# Altium PCB pcb_LEDCUBE.PcbDoc
Units mm, origin at the board's own origin, x right, y up, seen from the top; angles counter-clockwise.
Board outline 137.03 x 81.53 mm, 2 copper layers (Top Layer, Bottom Layer); 87 components, 151 nets, 387 pads, 94 vias.
Unrouted connection lines stored in the file: 2.
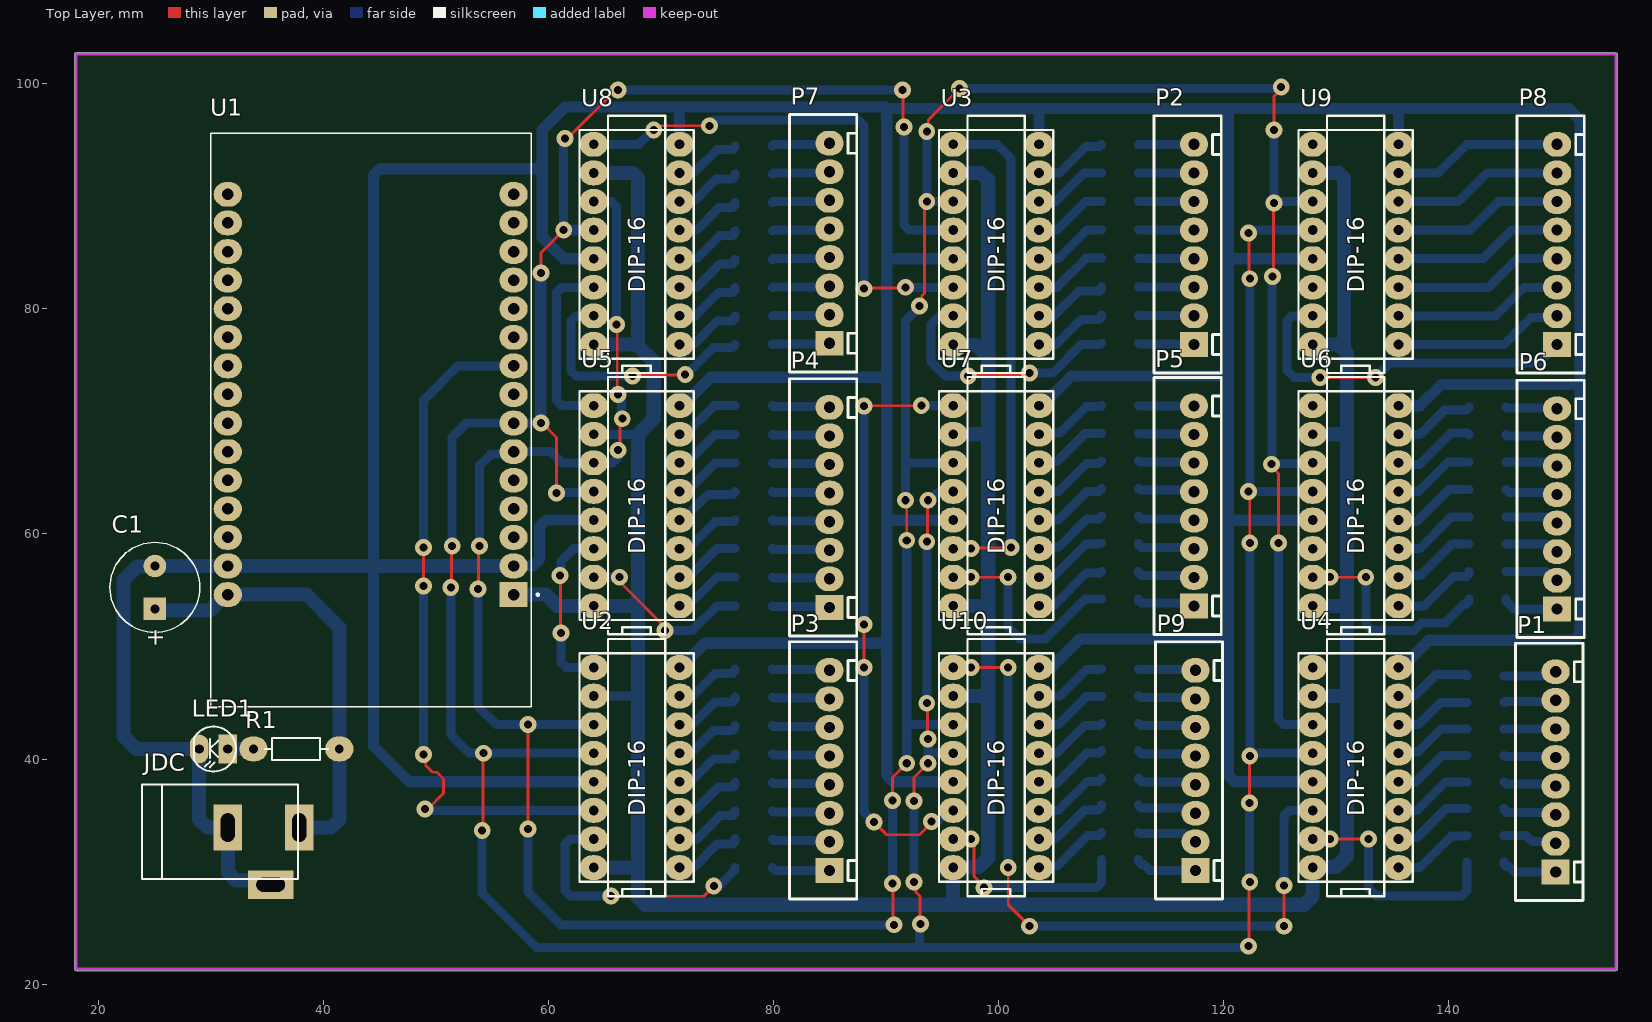
[diagram p0: Top Layer view]
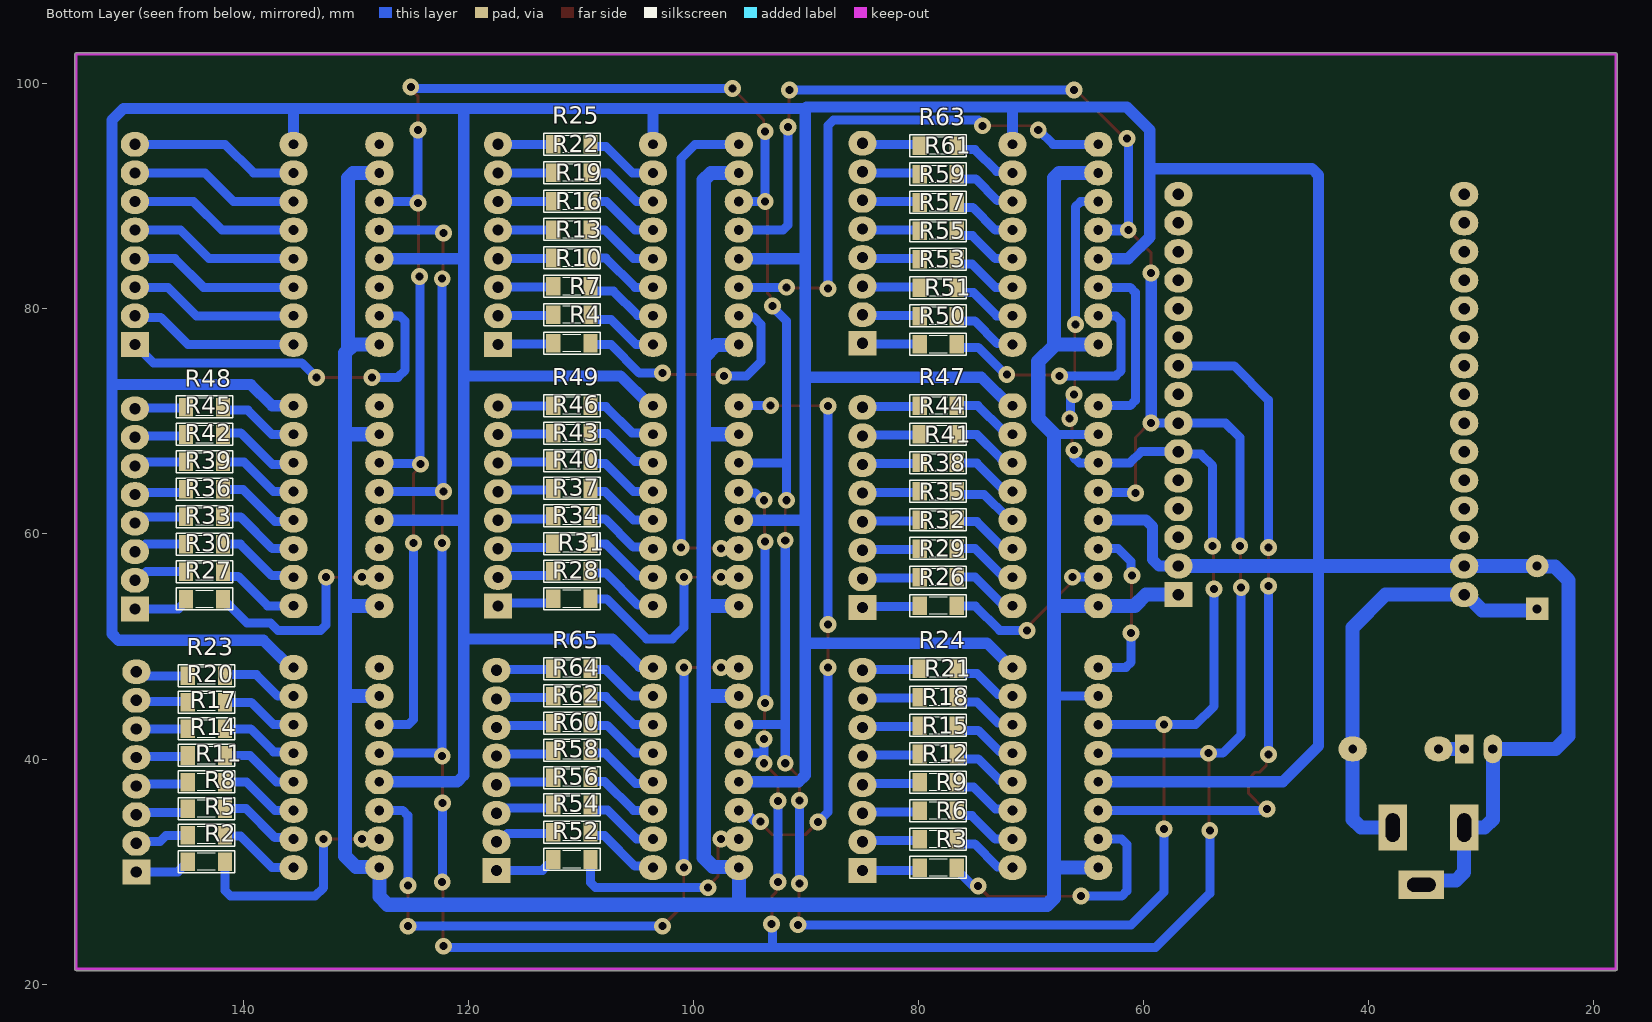
[diagram p1: Bottom Layer view, seen from below]
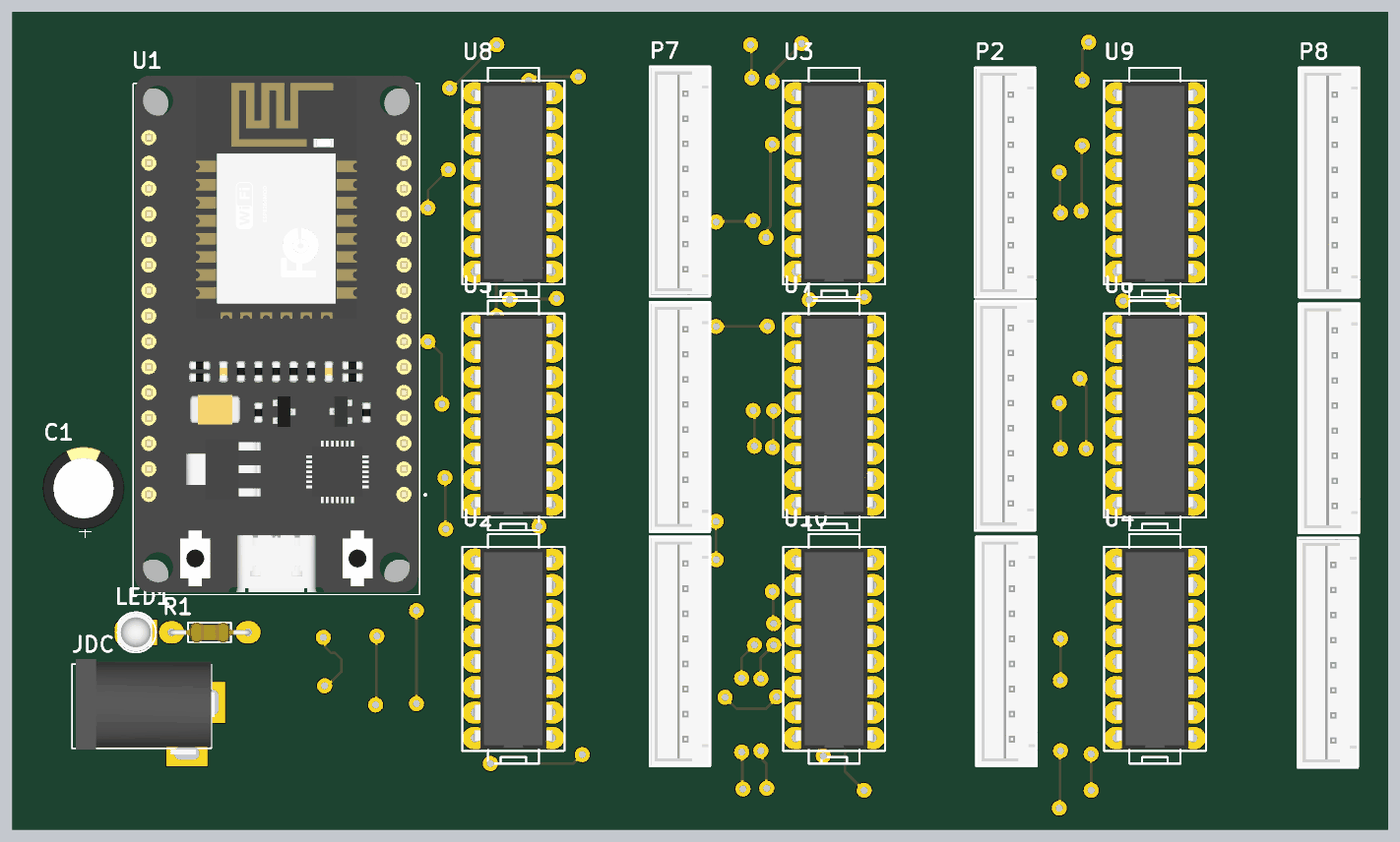
[diagram p2: 3D render of the assembled board from above, using the file's embedded part models]
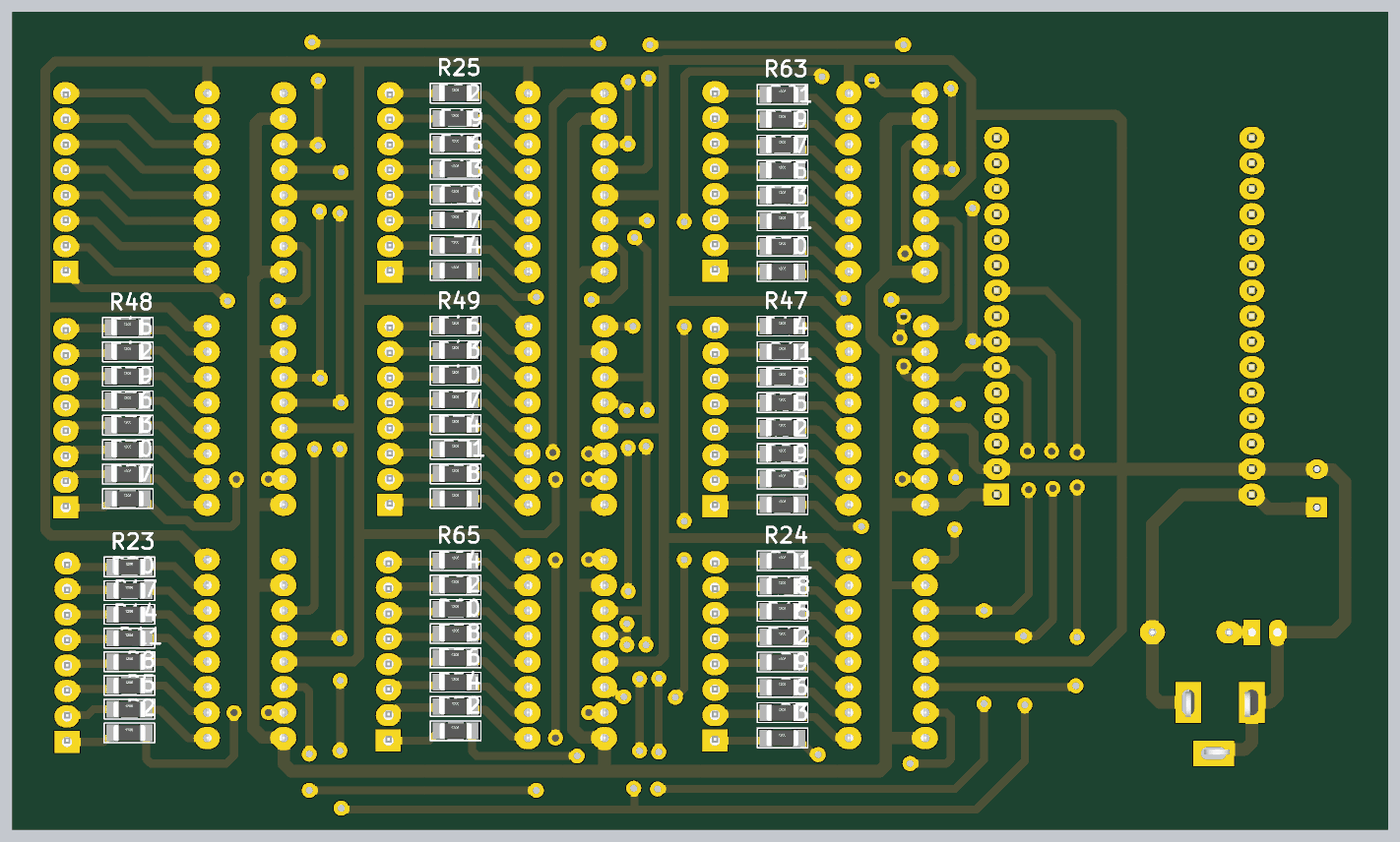
[diagram p3: 3D render of the assembled board from below, using the file's embedded part models]

## Layer stack, top to bottom
Top Solder: solder mask 0.0102, Solder Resist, Dk 3.5
Top Layer: signal copper 0.0356
Dielectric 1: dielectric 0.32, FR-4, Dk 4.8
Bottom Layer: signal copper 0.0356
Bottom Solder: solder mask 0.0102, Solder Resist, Dk 3.5

## Board outline
18.034,21.209 cw(c18.034,21.336) 17.907,21.336 17.907,102.616 cw(c18.034,102.616) 18.034,102.743 154.813,102.743 cw(c154.813,102.616) 154.94,102.616 154.94,21.336 cw(c154.813,21.336) 154.813,21.209

## Design rules (kind name [scope] priority, off if disabled: settings)
Clearance [All] p1: gap=0.254 ignorepadtopadclearanceinfootprint=FALSE except(0: Arc-Hole Track-Hole SMDPad-Hole THPad-Hole Via-Hole Fill-Hole Poly-Hole Region-Hole Text-Hole)
PolygonConnect [All] p1: connectstyle=Relief reliefconductorwidth=0.254 reliefentries=4 polygonreliefangle="90 Angle" airgapwidth=0.254
RoutingVias [All] p1: holewidth=0.711 width=1.27 viastyle="Through Hole" minholewidth=0.711 minwidth=1.27 maxholewidth=0.711 maxwidth=1.27
SolderMaskExpansion [All] p1: expansion=0.102 istentingtop=FALSE
Width [All] p1: maxlimit=1.25 minlimit=0.254 preferedwidth=1 toplayer_maxwidth=0.254 toplayer_prefwidth=0.254 bottomlayer_minwidth=0.8 minimp=50.000000 maximp=50.000000 favimp=50.000000
30 further rules are at their usual default settings.

## Components (designator, comment, footprint, x,y, rotation, side; value= is the part's Value field where it differs from the comment)
C1 "560uf/16v" CA-ALU-8 25.019,55.245 r90 top value=104
JDC "Jac DC" DC-IN 34.671,31.369 r0 top
LED1 "LED" LED-3 31.496,40.894 r180 top value="LED 3 ly Single Colour"
P1 "Header 8" CON_8P 149.479,29.972 r90 top
P2 "Header 8" CON_8P 117.348,76.835 r90 top
P3 "Header 8" CON_8P 84.963,30.099 r90 top
P4 "Header 8" CON_8P 84.963,53.467 r90 top
P5 "Header 8" CON_8P 117.348,53.594 r90 top
P6 "Header 8" CON_8P 149.606,53.34 r90 top
P7 "Header 8" CON_8P 84.963,76.937 r90 top
P8 "Header 8" CON_8P 149.606,76.835 r90 top
P9 "Header 8" CON_8P 117.475,30.099 r90 top
R1 "260" RES-1/8W 37.465,40.894 r0 top value="R1/4W - 1K"
R2 "180" RES-SMD-1206 143.256,30.861 r180 bottom
R3 "180" RES-SMD-1206 78.232,30.353 r180 bottom
R4 "180" RES-SMD-1206 110.782,76.937 r180 bottom
R5 "180" RES-SMD-1206 143.256,33.223 r180 bottom
R6 "180" RES-SMD-1206 78.232,32.877 r180 bottom
R7 "180" RES-SMD-1206 110.782,79.462 r180 bottom
R8 "180" RES-SMD-1206 143.256,35.585 r180 bottom
R9 "180" RES-SMD-1206 78.232,35.4 r180 bottom
R10 "180" RES-SMD-1206 110.782,81.988 r180 bottom
R11 "180" RES-SMD-1206 143.256,37.948 r180 bottom
R12 "180" RES-SMD-1206 78.232,37.924 r180 bottom
R13 "180" RES-SMD-1206 110.782,84.513 r180 bottom
R14 "180" RES-SMD-1206 143.256,40.31 r180 bottom
R15 "180" RES-SMD-1206 78.232,40.448 r180 bottom
R16 "180" RES-SMD-1206 110.782,87.039 r180 bottom
R17 "180" RES-SMD-1206 143.256,42.672 r180 bottom
R18 "180" RES-SMD-1206 78.232,42.971 r180 bottom
R19 "180" RES-SMD-1206 110.782,89.564 r180 bottom
R20 "180" RES-SMD-1206 143.256,45.034 r180 bottom
R21 "180" RES-SMD-1206 78.232,45.495 r180 bottom
R22 "180" RES-SMD-1206 110.782,92.09 r180 bottom
R23 "180" RES-SMD-1206 143.256,47.396 r180 bottom
R24 "180" RES-SMD-1206 78.232,48.019 r180 bottom
R25 "180" RES-SMD-1206 110.782,94.615 r180 bottom
R26 "180" RES-SMD-1206 78.232,53.614 r180 bottom
R27 "180" RES-SMD-1206 143.421,54.21 r180 bottom
R28 "180" RES-SMD-1206 110.782,54.224 r180 bottom
R29 "180" RES-SMD-1206 78.232,56.154 r180 bottom
R30 "180" RES-SMD-1206 143.421,56.647 r180 bottom
R31 "180" RES-SMD-1206 110.782,56.676 r180 bottom
R32 "180" RES-SMD-1206 78.232,58.694 r180 bottom
R33 "180" RES-SMD-1206 143.421,59.084 r180 bottom
R34 "180" RES-SMD-1206 110.782,59.129 r180 bottom
R35 "180" RES-SMD-1206 78.232,61.234 r180 bottom
R36 "180" RES-SMD-1206 143.421,61.522 r180 bottom
R37 "180" RES-SMD-1206 110.782,61.582 r180 bottom
R38 "180" RES-SMD-1206 78.232,63.774 r180 bottom
R39 "180" RES-SMD-1206 143.421,63.959 r180 bottom
R40 "180" RES-SMD-1206 110.782,64.035 r180 bottom
R41 "180" RES-SMD-1206 78.232,66.314 r180 bottom
R42 "180" RES-SMD-1206 143.421,66.397 r180 bottom
R43 "180" RES-SMD-1206 110.782,66.488 r180 bottom
R44 "180" RES-SMD-1206 78.232,68.854 r180 bottom
R45 "180" RES-SMD-1206 143.421,68.834 r180 bottom
R46 "180" RES-SMD-1206 110.782,68.941 r180 bottom
R47 "180" RES-SMD-1206 78.232,71.394 r180 bottom
R48 "180" RES-SMD-1206 143.421,71.271 r180 bottom
R49 "180" RES-SMD-1206 110.782,71.394 r180 bottom
R50 "180" RES-SMD-1206 78.232,76.835 r180 bottom
R51 "180" RES-SMD-1206 78.232,79.357 r180 bottom
R52 "180" RES-SMD-1206 110.782,31.071 r180 bottom
R53 "180" RES-SMD-1206 78.232,81.879 r180 bottom
R54 "180" RES-SMD-1206 110.782,33.492 r180 bottom
R55 "180" RES-SMD-1206 78.232,84.401 r180 bottom
R56 "180" RES-SMD-1206 110.782,35.912 r180 bottom
R57 "180" RES-SMD-1206 78.232,86.922 r180 bottom
R58 "180" RES-SMD-1206 110.782,38.332 r180 bottom
R59 "180" RES-SMD-1206 78.232,89.444 r180 bottom
R60 "180" RES-SMD-1206 110.782,40.752 r180 bottom
R61 "180" RES-SMD-1206 78.232,91.966 r180 bottom
R62 "180" RES-SMD-1206 110.782,43.173 r180 bottom
R63 "180" RES-SMD-1206 78.232,94.488 r180 bottom
R64 "180" RES-SMD-1206 110.782,45.593 r180 bottom
R65 "180" RES-SMD-1206 110.782,48.013 r180 bottom
U1 "ESP32-DEVKIT-V1" MODULE_ESP32_DEVKIT_V1 44.196,70.125 r180 top
U2 "MC74HC595AN" DIP.100/16/W.300/L.900 67.818,39.25 r90 top
U3 "MC74HC595AN" DIP.100/16/W.300/L.900 99.757,85.732 r90 top
U4 "MC74HC595AN" DIP.100/16/W.300/L.900 131.697,39.25 r90 top
U5 "MC74HC595AN" DIP.100/16/W.300/L.900 67.816,62.511 r90 top
U6 "MC74HC595AN" DIP.100/16/W.300/L.900 131.697,62.511 r90 top
U7 "MC74HC595AN" DIP.100/16/W.300/L.900 99.757,62.511 r90 top
U8 "MC74HC595AN" DIP.100/16/W.300/L.900 67.816,85.732 r90 top
U9 "MC74HC595AN" DIP.100/16/W.300/L.900 131.697,85.732 r90 top
U10 "MC74HC595AN" DIP.100/16/W.300/L.900 99.758,39.25 r90 top

## Footprints (in the part's own frame and the unit in brackets; to place one, negate y for a bottom-side part, rotate by r counter-clockwise, add the part's x,y. Pads: shape width x height; smd on the part's side, far side on the other; paste and mask are expansions set on the pad)
CA-ALU-8 [mm] "Polarized capacitors, Aluminum Electrolytic Capacitors, 2-Leads, Body 8x16x3.5x0.5"
  rect 2x2 hole 0.8: 1(-1.905,0)
  round 2 hole 0.8: 2(1.905,0)
  silkscreen extent -4,-4 4,4, body extent -4.1,-4.1 4.1,4.1, height 14.4
CON_8P [mm]
  rect 2.2x2.5 hole 1 unplated: 1(0,0)
  oval 2.2x2.5 hole 1 unplated: 2(2.54,0) 3(5.08,0)
  oval 2.2x2.5 hole 1 unplated mask+0.102: 4(7.62,0) 5(10.16,0) 6(12.7,0) 7(15.24,0) 8(17.78,0)
  silkscreen extent -2.54,-2.41 20.32,3.56, body extent -2.41,-2.29 20.19,3.41, height 7
DC-IN [mil]
  rect 100x160 hole 50 slot 100 at 90 deg: 1(125,100) 2(-125,100)
  rect 160x100 hole 50 slot 100 at 0 deg: 3(25,-100)
  silkscreen extent -425,-80 120,250, body extent -410,-105 134,269, height 434
DIP.100/16/W.300/L.900 [mm]
  oval 2.2x2.5 hole 0.864: 1(-8.897,-3.812) 2(-6.357,-3.812) 3(-3.817,-3.812) 4(-1.277,-3.812) 5(1.263,-3.812) 6(3.803,-3.812) 7(6.343,-3.812) 8(8.883,-3.812) 9(8.883,3.808) 10(6.343,3.808) 11(3.803,3.808) 12(1.263,3.808) 13(-1.277,3.808) 14(-3.817,3.808) 15(-6.357,3.808) 16(-8.897,3.808)
  silkscreen extent -11.44,-5.08 11.42,5.08, body extent -10,-3.93 10,3.94, height 2.49
LED-3 [mil] "LED 2 PIN, 3ly Only colour"
  rect 65x100 hole 32: 1(0,0)
  oval 65x100 hole 32: 2(100,0)
  silkscreen extent -29,-78 118,79, body extent -13,-75 125,75, height 217
MODULE_ESP32_DEVKIT_V1 [mm]
  rect 2.5x2.2 hole 1.02: 1(-12.7,15.515)
  oval 2.5x2.2 hole 1.02: 2(-12.7,12.975) 3(-12.7,10.435) 4(-12.7,7.895) 5(-12.7,5.355) 6(-12.7,2.815) 7(-12.7,0.275) 8(-12.7,-2.265) 9(-12.7,-4.805) 10(-12.7,-7.345) 11(-12.7,-9.885) 12(-12.7,-12.425) 13(-12.7,-14.965) 14(-12.7,-17.505) 15(-12.7,-20.045) 16(12.7,-20.045) 17(12.7,-17.505) 18(12.7,-14.965) 19(12.7,-12.425) 20(12.7,-9.885) 21(12.7,-7.345) 22(12.7,-4.805) 23(12.7,-2.265) 24(12.7,0.275) 25(12.7,2.815) 26(12.7,5.355) 27(12.7,7.895) 28(12.7,10.435) 29(12.7,12.975) 30(12.7,15.515)
  round 3 on Top Paste: ""(-12.28,23.475) ""(-12.28,-23.475) ""(12.23,23.475) ""(12.23,-23.475)
  silkscreen extent -14.95,-25.48 14.23,25.48, body extent -14.1,-26.26 14.05,25.24, height 7.01
RES-1/8W [mm]
  oval 2.5x2.2 hole 0.787: 1(-3.683,0) 2(3.937,0)
  silkscreen extent -2.67,-0.97 2.92,0.97, body extent -3.92,-1.02 4.18,0.98, height 2.02
RES-SMD-1206 [mil]
  rect 50x65 smd: 1(-65,0) 2(65,0)
  silkscreen extent -99,-38 99,39, body extent -63,-31 63,32, height 40

## Part data
C1: library part CAP-ALU-DIP, "Capacitor (Semiconductor SIM Model)", LatestRevisionDate=17-Jul-2002, LatestRevisionNote="Re-released for DXP Platform.", PackageReference=C1206, Publisher="Altium Limited"
JDC: library part DCIN, "Jac DC input"
LED1: "LED Single colour Green and Red"
P1 P2 P3 P4 P5 P6 P7 P8 P9: "Header, 8-Pin", LatestRevisionDate=17-Jul-2002, LatestRevisionNote="Re-released for DXP Platform.", Publisher="Altium Limited"
R1: library part "Resistor - DIP", "Resistor - DIP"
R2 R3 R4 R5 R6 R7 R8 R9 R10 R11 R12 R13 R14 R15 R16 R17 R18 R19 R20 R21 R22 R23 R24 R25 R26 R27 R28 R29 R30 R31 R32 R33 R34 R35 R36 R37 R38 R39 R40 R41 R42 R43 R44 R45 R46 R47 R48 R49 R50 R51 R52 R53 R54 R55 R56 R57 R58 R59 R60 R61 R62 R63 R64 R65: library part "Resistor - SMD", "Resistor SMD", Manufacturer="Generic Components", Class=Passive, Published=08/06/2000, Publisher="Altium Hobart Technology Centre"
U1: "Dual core, Wi-Fi: 2.4 GHz up to 150 Mbits/s,BLE (Bluetooth Low Energy) and legacy Bluetooth, 32 bits, Up to 240 MHz", Package=None, Availability=Unavailable, MP=ESP32-DEVKIT-V1, Price=None
U2 U3 U4 U5 U6 U7 U8 U9 U10: "8-Bit Serial-Input/Serial or Prallel-Output Shift Register with Latched 3-State Outputs", Code_JEDEC=MS-001-BB, ComponentLink1Description="Manufacturer Link", ComponentLink1URL=http://www.onsemi.com/, ComponentLink2Description=Datasheet, ComponentLink2URL=http://www.onsemi.com/pub/Collateral/MC74HC595A-D.PDF, DatasheetVersion=Mar-2000, PackageDescription="DIP; 16 Leads; Row Spacing 7.62 mm; Pitch 2.54 mm", PackageReference=648-08, PackageVersion=Apr-2000, Published=15-Apr-2002, Publisher="Altium Limited"

## Via types
v1: diameter 1.5, hole 0.711, Top Layer to Bottom Layer, 94 vias

## Nets (pads, with @x,y where several pads share a name; then routed paths per layer and width w, separated by ;. In a path a pad name is that pad's centre, name@x,y a point inside that pad or via, vN(x,y) a via of type N, cw(c..) or ccw(c..) an arc to the next point about the centre after c; other vN are vias at no path point)
+3.3: U1.1 U2.10 U2.16 U3.10 U3.16 U4.10 U4.16 U5.10 U5.16 U6.10 U6.16 U7.10 U7.16 U8.10 U8.16 U9.10 U9.16 U10.10 U10.16 | length 321.3
  Bottom Layer w0.8: U5.10 67.925,68.854 67.945,68.834 ; U2.10 67.945,45.593
  Bottom Layer w1.25: U1.1 59.771,54.61 60.767,53.614 U5.16 67.925,53.614 67.945,53.594 ; U8.16 67.818,76.835 67.945,76.708 ; U8.10 67.476,92.075 67.945,91.606 67.945,76.708 ; U2.16 67.818,30.353 67.945,30.226 ; 67.925,68.854 69.342,70.271 69.342,75.311 67.945,76.708 ; 67.945,68.834 67.945,53.594 ; U7.16 98.913,53.614 99.06,53.467 ; U7.10 99.04,68.854 99.06,68.834 ; U3.16 95.996,76.787 97.965,76.787 99.06,75.692 ; U3.10 98.425,92.075 99.06,91.44 99.06,75.692 ; U10.10 99.06,45.593 ; U4.10 130.81,45.593 130.937,45.466 ; U6.16 130.83,53.614 130.937,53.721 ; U6.10 130.917,68.854 130.937,68.834 ; U9.16 130.175,76.835 130.429,76.581 ; U9.10 130.214,92.075 130.683,91.606 130.683,76.327 ; 130.937,76.073 130.937,68.834 ; 67.945,30.226 67.945,45.593 67.945,53.594 ; 67.945,30.226 67.945,27.656 68.55,27.051 95.885,27.051 ; 95.885,27.051 127.157,27.051 127.889,27.783 U4.16 127.937,30.401 129.969,30.401 130.937,31.369 130.937,45.466 ; 95.885,27.051 95.949,27.115 U10.16 95.997,30.401 98.219,30.401 99.06,31.242 99.06,45.593 ; 99.06,45.593 99.06,53.467 ; 99.06,53.467 99.06,68.834 ; 99.06,68.834 99.06,75.692 ; 130.937,45.466 130.937,53.721 ; 130.937,53.721 130.937,68.834
+5: C1.1 JDC.1 R1.2 U1.30 | length 39.1
  Bottom Layer w1.25: C1.1 25.144,53.215 27.644,53.215 27.646,53.213 29.896,53.213 31.293,54.61 U1.30 38.481,54.61 41.402,51.689 R1.2 41.402,34.641 40.67,33.909 JDC.1
Data: U1.9 U2.14 | length 62.4
  Top Layer w0.254: v1(48.895,40.386) 49.089,40.192 49.089,39.43 49.691,38.828 50.072,38.828 50.673,38.227 50.673,36.957 49.276,35.56 v1(49.022,35.56) ; v1(48.895,55.372) v1(48.895,58.801)
  Bottom Layer w0.8: v1(48.895,40.386) v1(48.895,55.372) ; v1(48.895,58.801) 48.895,71.882 51.943,74.93 U1.9 ; v1(49.022,35.56) 49.112,35.47 49.444,35.47 49.481,35.433 U2.14
Data_1: U2.9 U5.14 | length 15.5
  Top Layer w0.254: v1(61.005,56.306) 61.046,56.265 61.046,51.222 v1(61.087,51.181)
  Bottom Layer w0.8: v1(61.005,56.306) 61.095,56.396 61.095,57.539 62.25,58.694 U5.14 ; v1(61.087,51.181) 61.087,48.602 61.556,48.133 U2.9
Data_2: U5.9 U8.14 | length 16.6
  Bottom Layer w0.8: U5.9 61.175,71.394 60.706,71.863 60.706,81.446 61.175,81.915 U8.14
Data_3: U3.14 U8.9 | length 47.1
  Top Layer w0.254: v1(69.342,95.885) 69.617,95.885 69.998,96.266 v1(74.295,96.266) ; v1(88.011,81.788) 88.075,81.852 91.504,81.852 91.567,81.788 v1(91.694,81.915)
  Bottom Layer w0.8: U8.9 68.017,94.615 69.287,95.885 v1(69.342,95.885) ; v1@74.66,96.774 87.542,96.774 88.011,96.305 v1(88.011,81.788) ; v1(91.694,81.915) U3.14
Data_4: U3.9 U7.14 | length 45.6
  Top Layer w0.254: v1(97.546,58.694) 97.599,58.747 101.038,58.747 v1(101.092,58.801)
  Bottom Layer w0.8: U7.14 v1(97.546,58.694) v1@97.761,58.694 ; U3.9 99.822,94.615 101.092,93.345 v1(101.092,58.801)
Data_5: U7.9 U10.14 | length 53.8
  Top Layer w0.254: v1(88.011,48.133) v1(88.011,51.943) ; v1(88.011,71.374) 88.021,71.384 93.081,71.384 93.091,71.374 v1(93.111,71.394) ; v1(88.9,34.417) 90.043,33.274 92.964,33.274 94.025,34.335 v1(94.025,34.462)
  Bottom Layer w0.8: v1(88.011,48.133) 88.011,35.306 v1(88.9,34.417) ; v1(88.011,51.943) v1(88.011,71.374) ; v1(93.111,71.394) U7.9 ; v1(94.025,34.462) 94.115,34.552 94.629,34.552 95.51,35.433 U10.14
Data_6: U4.14 U10.9 | length 62.2
  Top Layer w0.254: v1(97.536,48.133) v1(100.838,48.133) ; v1(100.838,30.353) 100.838,27.051 v1(102.743,25.146) ; v1(125.349,25.146) v1(125.349,28.757)
  Bottom Layer w0.8: v1(100.838,30.353) v1(100.838,48.133) ; v1(102.743,25.146) v1(125.349,25.146) ; v1(125.349,28.757) 125.349,34.964 125.818,35.433 U4.14
Data_7: U4.9 U6.14
Data_8: U6.9 U9.14
G_P1: P8.1 U9.15 | length 32.3
  Top Layer w0.254: v1(128.524,73.914) v1(133.477,73.914)
  Bottom Layer w0.8: U9.15 126.072,79.375 125.603,78.906 125.603,74.549 126.238,73.914 v1(128.524,73.914) ; v1(133.477,73.914) 133.51,73.914 134.791,75.195 147.966,75.195 P8.1
G_P2: P8.2 U9.1 | length 15.1
  Bottom Layer w0.8: U9.1 144.907,76.835 147.32,79.248 149.479,79.248 P8.2
G_P3: P8.3 U9.2 | length 15.1
  Bottom Layer w0.8: U9.2 144.145,79.375 146.685,81.915 P8.3
G_P4: P8.4 U9.3 | length 15.1
  Bottom Layer w0.8: U9.3 143.51,81.915 146.05,84.455 P8.4
G_P5: P8.5 U9.4 | length 15.1
  Bottom Layer w0.8: U9.4 143.002,84.455 145.542,86.995 P8.5
G_P6: P8.6 U9.5 | length 15.1
  Bottom Layer w0.8: U9.5 141.859,86.995 144.399,89.535 P8.6
G_P7: P8.7 U9.6 | length 15.1
  Bottom Layer w0.8: U9.6 140.843,89.535 143.383,92.075 P8.7
G_P8: P8.8 U9.7 | length 15.1
  Bottom Layer w0.8: U9.7 139.065,92.075 141.605,94.615 P8.8
GND: C1.2 JDC.2 JDC.3 LED1.2 U1.2 U1.29 U2.8 U2.13 U3.8 U3.13 U4.8 U4.13 U5.8 U5.13 U6.8 U6.13 U7.8 U7.13 U8.8 U8.13 U9.8 U9.13 U10.8 U10.13 | length 602.3
  Bottom Layer w1: U1.2 58.596,57.15 59.182,57.736 59.182,60.648 59.768,61.234 U5.13 ; U8.13 61.341,84.455 59.436,86.36 59.436,92.456 ; U2.13 47.625,37.973 44.45,41.148 44.45,57.15 44.45,91.87 45.036,92.456 59.436,92.456 ; U5.8 71.878,71.394 74.398,73.914 90.043,73.914 ; U8.8 71.628,97.536 ; U2.8 71.745,48.133 72.13,48.518 73.904,50.292 90.043,50.292 ; U7.13 95.929,61.214 90.043,61.214 ; U3.13 90.043,84.455 ; U10.13 90.629,37.973 90.043,38.559 90.043,50.292 ; U7.8 103.818,71.394 106.465,74.041 120.396,74.041 ; U3.8 103.569,97.727 103.632,97.79 ; U10.8 103.665,48.229 104.744,48.229 107.188,50.673 120.396,50.673 ; U4.13 120.966,37.973 120.396,38.543 120.396,50.673 ; U6.13 127.869,61.214 120.396,61.214 ; U9.13 120.396,84.455 ; U4.8 135.759,48.133 138.172,50.546 151.052,50.546 151.638,51.132 151.638,73.279 ; U6.8 137.434,71.394 139.319,73.279 151.638,73.279 ; U9.8 135.509,97.79 ; 59.436,92.456 59.436,95.885 61.479,97.928 71.628,97.928 89.905,97.928 90.043,97.79 ; 90.043,50.292 90.043,61.214 ; 90.043,61.214 90.043,73.914 ; 90.043,73.914 90.043,84.455 ; 90.043,84.455 90.043,97.79 ; 90.043,97.79 103.632,97.79 ; 103.632,97.79 120.396,97.79 ; 120.396,50.673 120.396,61.214 ; 120.396,61.214 120.396,74.041 ; 120.396,74.041 120.396,84.455 ; 120.396,84.455 120.396,97.79 ; 120.396,97.79 135.509,97.79 ; 135.509,97.79 150.622,97.79 151.638,96.774 151.638,73.279
  Bottom Layer w1.25: JDC.3 34.93,29.205 32.228,29.205 31.496,29.937 JDC.2 29.688,33.909 28.956,34.641 LED1.2 23.368,40.894 22.225,42.037 22.225,55.88 23.447,57.102 24.971,57.102 C1.2 U1.29 44.45,57.15 U1.2
L1_A1: P3.1 R3.1 | length 5.2
  Bottom Layer w0.8: R3.1 79.883,30.334 80.118,30.099 P3.1
L1_A2: P3.2 R6.1 | length 5.2
  Bottom Layer w0.8: R6.1 80.002,32.758 84.844,32.758 P3.2
L1_A3: P3.3 R9.1 | length 5.2
  Bottom Layer w0.8: R9.1 79.994,35.29 84.852,35.29 P3.3
L1_A4: P3.4 R12.1 | length 5.2
  Bottom Layer w0.8: R12.1 79.986,37.822 84.86,37.822 P3.4
L1_A5: P3.5 R15.1 | length 5.2
  Bottom Layer w0.8: R15.1 79.977,40.353 84.869,40.353 P3.5
L1_A6: P3.6 R18.1 | length 5.2
  Bottom Layer w0.8: R18.1 79.969,42.885 84.877,42.885 P3.6
L1_A7: P3.7 R21.1 | length 5.1
  Bottom Layer w0.8: R21.1 79.961,45.417 84.885,45.417 P3.7
L1_A8: P3.8 R24.1 | length 5.1
  Bottom Layer w0.8: R24.1 79.953,47.949 84.893,47.949 P3.8
L2_A1: P4.1 R26.1 | length 5.1
  Bottom Layer w0.8: R26.1 79.957,53.54 84.89,53.54 P4.1
L2_A2: P4.2 R29.1 | length 5.1
  Bottom Layer w0.8: R29.1 79.957,56.081 84.889,56.081 P4.2
L2_A3: P4.3 R32.1 | length 5.1
  Bottom Layer w0.8: R32.1 79.957,58.621 84.889,58.621 P4.3
L2_A4: P4.4 R35.1 | length 5.1
  Bottom Layer w0.8: R35.1 79.957,61.161 84.889,61.161 P4.4
L2_A5: P4.5 R38.1 | length 5.1
  Bottom Layer w0.8: R38.1 79.957,63.701 84.889,63.701 P4.5
L2_A6: P4.6 R41.1 | length 5.1
  Bottom Layer w0.8: R41.1 79.957,66.241 84.889,66.241 P4.6
L2_A7: P4.7 R44.1 | length 5.1
  Bottom Layer w0.8: R44.1 79.957,68.781 84.889,68.781 P4.7
L2_A8: P4.8 R47.1 | length 5.1
  Bottom Layer w0.8: R47.1 79.957,71.321 84.889,71.321 P4.8
L3_A1: P7.1 R50.1 | length 5.1
  Bottom Layer w0.8: R50.1 79.934,76.886 84.912,76.886 P7.1
L3_A2: P7.2 R51.1 | length 5.1
  Bottom Layer w0.8: R51.1 79.943,79.417 84.903,79.417 P7.2
L3_A3: P7.3 R53.1 | length 5.1
  Bottom Layer w0.8: R53.1 79.952,81.948 84.894,81.948 P7.3
L3_A4: P7.4 R55.1 | length 5.1
  Bottom Layer w0.8: R55.1 79.961,84.479 84.885,84.479 P7.4
L3_A5: P7.5 R57.1 | length 5.2
  Bottom Layer w0.8: R57.1 79.97,87.01 84.876,87.01 P7.5
L3_A6: P7.6 R59.1 | length 5.2
  Bottom Layer w0.8: R59.1 79.979,89.541 84.867,89.541 P7.6
L3_A7: P7.7 R61.1 | length 5.2
  Bottom Layer w0.8: R61.1 79.988,92.071 84.858,92.071 P7.7
L3_A8: P7.8 R63.1 | length 5.2
  Bottom Layer w0.8: R63.1 79.997,94.602 84.849,94.602 P7.8
L4_A1: P2.1 R4.1 | length 5
  Bottom Layer w0.8: R4.1 112.484,76.886 117.297,76.886 P2.1
L4_A2: P2.2 R7.1 | length 5
  Bottom Layer w0.8: R7.1 112.477,79.419 117.304,79.419 P2.2
L4_A3: P2.3 R10.1 | length 4.9
  Bottom Layer w0.8: R10.1 112.469,81.951 117.312,81.951 P2.3
L4_A4: P2.4 R13.1 | length 4.9
  Bottom Layer w0.8: R13.1 112.462,84.484 117.319,84.484 P2.4
L4_A5: P2.5 R16.1 | length 4.9
  Bottom Layer w0.8: R16.1 112.455,87.017 117.326,87.017 P2.5
L4_A6: P2.6 R19.1 | length 4.9
  Bottom Layer w0.8: R19.1 112.448,89.55 117.333,89.55 P2.6
L4_A7: P2.7 R22.1 | length 4.9
  Bottom Layer w0.8: R22.1 112.44,92.082 117.341,92.082 P2.7
L4_A8: P2.8 R25.1 | length 4.9
  Bottom Layer w0.8: R25.1 P2.8
L5_A1: P5.1 R28.1 | length 5.3
  Bottom Layer w0.8: R28.1 112.433,54.083 112.668,53.848 117.094,53.848 P5.1
L5_A2: P5.2 R31.1 | length 5.2
  Bottom Layer w0.8: R31.1 112.433,56.556 112.668,56.321 117.161,56.321 P5.2
L5_A3: P5.3 R34.1 | length 5.2
  Bottom Layer w0.8: R34.1 112.433,59.036 112.668,58.801 117.221,58.801 P5.3
L5_A4: P5.4 R37.1 | length 5.1
  Bottom Layer w0.8: R37.1 112.433,61.576 112.668,61.341 117.221,61.341 P5.4
L5_A5: P5.5 R40.1 | length 5
  Bottom Layer w0.8: R40.1 112.574,63.895 117.207,63.895 P5.5
L5_A6: P5.6 R43.1 | length 5
  Bottom Layer w0.8: R43.1 112.53,66.391 117.251,66.391 P5.6
L5_A7: P5.7 R46.1 | length 5
  Bottom Layer w0.8: R46.1 112.487,68.888 117.294,68.888 P5.7
L5_A8: P5.8 R49.1 | length 4.9
  Bottom Layer w0.8: R49.1 112.443,71.384 117.338,71.384 P5.8
L6_A1: P9.1 R52.1 | length 5.6
  Bottom Layer w0.8: R52.1 112.433,30.881 112.668,30.646 112.859,30.646 113.406,30.099 P9.1
L6_A2: P9.2 R54.1 | length 5.4
  Bottom Layer w0.8: R54.1 112.524,33.401 116.517,33.401 117.279,32.639 P9.2
L6_A3: P9.3 R56.1 | length 5.4
  Bottom Layer w0.8: R56.1 112.433,35.864 112.668,35.629 116.761,35.629 117.21,35.179 P9.3
L6_A4: P9.4 R58.1 | length 5.4
  Bottom Layer w0.8: R58.1 112.433,38.208 112.668,37.973 116.529,37.973 116.596,37.906 117.288,37.906 P9.4
L6_A5: P9.5 R60.1 | length 5.3
  Bottom Layer w0.8: R60.1 112.433,40.681 112.668,40.446 117.288,40.446 P9.5
L6_A7: P9.7 R64.1 | length 5.1
  Bottom Layer w0.8: R64.1 112.56,45.466 117.348,45.466 P9.7
L6_A8: P9.8 R65.1 | length 5.1
  Bottom Layer w0.8: R65.1 112.5,47.946 117.408,47.946 P9.8
L7_A1: P1.1 R2.1 | length 5.1
  Bottom Layer w0.8: R2.1 144.907,30.67 145.142,30.436 145.332,30.436 145.796,29.972 P1.1
L7_A2: P1.2 R5.1 | length 4.9
  Bottom Layer w0.8: R5.1 146.823,33.223 147.39,32.656 149.335,32.656 P1.2
L7_A3: P1.3 R8.1 | length 4.9
  Bottom Layer w0.8: R8.1 144.907,35.474 145.142,35.239 149.292,35.239 P1.3
L7_A4: P1.4 R11.1 | length 4.7
  Bottom Layer w0.8: R11.1 145.085,37.77 149.301,37.77 P1.4
L7_A5: P1.5 R14.1 | length 4.6
  Bottom Layer w0.8: R14.1 144.996,40.221 149.39,40.221 P1.5
L7_A6: P1.6 R17.1 | length 4.6
  Bottom Layer w0.8: R17.1 P1.6
L7_A7: P1.7 R20.1 | length 4.6
  Bottom Layer w0.8: R20.1 144.996,45.123 149.39,45.123 P1.7
L7_A8: P1.8 R23.1 | length 4.7
  Bottom Layer w0.8: R23.1 148.859,47.396 149.214,47.752 P1.8
L8_A1: P6.1 R27.1 | length 5
  Bottom Layer w0.8: R27.1 145.072,54.019 145.751,53.34 P6.1
L8_A2: P6.2 R30.1 | length 4.9
  Bottom Layer w0.8: R30.1 148.574,56.647 149.341,55.88 P6.2
L8_A3: P6.3 R33.1 | length 4.8
  Bottom Layer w0.8: R33.1 148.677,59.085 149.341,58.42 P6.3
L8_A4: P6.4 R36.1 | length 4.8
  Bottom Layer w0.8: R36.1 148.779,61.522 149.341,60.96 P6.4
L8_A5: P6.5 R39.1 | length 4.7
  Bottom Layer w0.8: R39.1 145.072,63.922 145.307,63.687 149.419,63.687 P6.5
L8_A6: P6.6 R42.1 | length 4.7
  Bottom Layer w0.8: R42.1 148.985,66.397 149.341,66.04 P6.6
L8_A7: P6.7 R45.1 | length 4.6
  Bottom Layer w0.8: R45.1 145.199,68.707 149.479,68.707 P6.7
L8_A8: P6.8 R48.1 | length 4.6
  Bottom Layer w0.8: R48.1 145.148,71.196 149.53,71.196 P6.8
Latch: U1.7 U2.12 U3.12 U4.12 U5.12 U6.12 U7.12 U8.12 U9.12 U10.12 | length 345.1
  Top Layer w0.254: v1(51.308,55.245) 51.371,55.308 51.371,58.864 v1(51.435,58.928) ; v1(54.102,33.655) 54.165,33.718 54.165,40.322 54.102,40.386 v1(54.229,40.513) ; v1(59.309,69.85) 59.436,69.85 60.706,68.58 v1(60.706,63.627) ; v1(59.309,83.185) 59.309,84.963 v1(61.341,86.995) ; v1(61.468,95.123) 61.658,95.123 65.977,99.441 v1(66.167,99.441) ; v1(91.44,99.441) 91.504,99.377 91.504,96.203 v1(91.567,96.139) ; v1(92.456,29.083) 92.65,28.889 92.65,28.168 93.005,27.813 93.005,25.478 92.964,25.437 v1(93.046,25.355) ; v1(92.456,36.258) 92.456,38.354 v1(93.726,39.624) ; v1(93.599,44.958) 93.662,44.895 93.662,41.954 93.599,41.891 v1(93.726,41.764) ; v1(93.599,59.309) 93.726,59.436 93.662,59.499 93.662,62.928 v1(93.726,62.992) ; v1(122.174,23.368) 122.237,23.431 122.237,29.019 v1(122.301,29.083) ; v1(122.174,63.754) 122.301,63.627 v1(122.301,59.182) ; v1(122.174,86.741) 122.237,86.677 122.237,82.74 v1(122.301,82.677) ; v1(122.268,36.101) 122.284,36.118 122.284,40.242 v1(122.301,40.259)
  Bottom Layer w0.8: v1(51.308,55.245) 51.308,42.164 52.959,40.513 v1(54.229,40.513) U2.12 ; v1(51.435,58.928) 51.435,68.58 52.705,69.85 v1(59.309,69.85) ; v1(54.102,33.655) 54.102,28.067 58.928,23.241 92.964,23.241 ; v1(60.706,63.627) 60.779,63.7 63.935,63.7 U5.12 ; v1(61.341,86.995) 61.341,94.996 v1(61.468,95.123) ; v1(66.167,99.441) v1(91.44,99.441) ; v1(91.567,96.139) 91.567,87.464 92.036,86.995 U3.12 ; v1(92.456,29.083) v1(92.456,36.258) ; v1(93.046,25.355) 92.956,25.265 92.956,23.249 92.964,23.241 ; v1(93.599,44.958) v1(93.599,59.309) ; v1(93.726,41.764) 93.726,40.694 ; v1(93.726,62.992) 93.853,62.992 94.501,63.64 95.815,63.64 U7.12 ; v1@93.853,39.624 v1(93.726,39.624) 93.726,40.694 ; U10.12@95.816,40.379 U10.12 93.907,40.513 93.726,40.694 ; v1(122.174,23.368) 122.047,23.241 92.964,23.241 ; v1(122.174,86.741) 122.301,86.741 122.555,86.995 U9.12 ; v1(122.268,36.101) 122.284,36.085 122.284,29.1 v1(122.301,29.083) ; v1(122.301,40.259) v1(122.301,59.182) ; v1(122.301,82.677) 122.301,64.213 122.264,64.176 122.264,63.844 v1(122.174,63.754) 122.184,63.764 127.879,63.764 U6.12 ; v1@122.328,40.286 122.455,40.286 122.682,40.513 U4.12
  Bottom Layer w1: v1(59.309,69.85) v1(59.309,83.185) ; v1(61.341,86.995) U8.12
NetLED1_1: LED1.1 R1.1 | length 2.3
  Bottom Layer w1.25: LED1.1 R1.1
NetP9_6: P9.6 R62.1 | length 5.2
  Bottom Layer w0.8: R62.1 112.62,42.986 117.288,42.986 P9.6
NetR2_2: R2.2 U4.15 | length 21.1
  Top Layer w0.254: v1(129.423,32.893) v1(132.842,32.893)
  Bottom Layer w0.8: U4.15 v1(129.423,32.893) ; v1(132.842,32.893) 132.842,28.575 133.604,27.813 141.097,27.813 141.605,28.321 R2.2
NetR3_2: R3.2 U2.15 | length 23.3
  Top Layer w0.254: v1(65.532,27.813) 73.787,27.813 v1(74.676,28.702)
  Bottom Layer w0.8: U2.15 61.937,32.893 61.468,32.424 61.468,28.282 61.937,27.813 v1(65.532,27.813) ; v1(74.676,28.702) 74.766,28.792 75.21,28.792 76.581,30.162 R3.2
NetR4_2: R4.2 U3.15 | length 22.5
  Top Layer w0.254: v1(97.282,74.041) 97.409,74.168 102.616,74.168 v1(102.743,74.295)
  Bottom Layer w0.8: U3.15 95.848,79.274 94.641,79.274 93.98,78.613 93.98,75.311 95.25,74.041 v1(97.282,74.041) ; v1(102.743,74.295) 104.775,74.295 107.315,76.835 109.029,76.835 R4.2
NetR5_2: R5.2 U4.1 | length 7.3
  Bottom Layer w0.8: U4.1 137.414,30.353 140.239,33.178 141.559,33.178 R5.2
NetR6_2: R6.2 U2.1 | length 6.1
  Bottom Layer w0.8: U2.1 71.7,30.423 72.968,30.423 74.996,32.451 76.346,32.451 76.581,32.686 R6.2
NetR7_2: R7.2 U3.1 | length 6.8
  Bottom Layer w0.8: U3.1 105.094,76.835 107.296,79.037 108.896,79.037 109.131,79.272 R7.2
NetR8_2: R8.2 U4.2 | length 7.2
  Bottom Layer w0.8: U4.2 135.643,33.027 137.167,33.027 139.725,35.585 R8.2
NetR9_2: R9.2 U2.2 | length 6.1
  Bottom Layer w0.8: U2.2 73.152,32.893 75.234,34.975 76.346,34.975 76.581,35.21 R9.2
NetR10_2: R10.2 U3.2 | length 6.8
  Bottom Layer w0.8: U3.2 103.606,79.412 104.939,79.412 107.089,81.562 108.896,81.562 109.131,81.797 R10.2
NetR11_2: R11.2 U4.3 | length 7.1
  Bottom Layer w0.8: U4.3 137.16,35.433 139.675,37.948 R11.2
NetR12_2: R12.2 U2.3 | length 6.1
  Bottom Layer w0.8: U2.3 71.764,35.567 73.159,35.567 75.091,37.499 76.346,37.499 76.581,37.734 R12.2
NetR13_2: R13.2 U3.3 | length 6.7
  Bottom Layer w0.8: U3.3 103.695,82.042 103.822,81.915 105.156,81.915 107.754,84.513 R13.2
NetR14_2: R14.2 U4.4 | length 7.1
  Bottom Layer w0.8: U4.4 137.033,37.973 139.37,40.31 R14.2
NetR15_2: R15.2 U2.4 | length 6.1
  Bottom Layer w0.8: U2.4 71.764,38.107 72.778,38.107 74.693,40.022 76.346,40.022 76.581,40.257 R15.2
NetR16_2: R16.2 U3.4 | length 6.6
  Bottom Layer w0.8: U3.4 105.283,84.455 107.823,86.995 109.087,86.995 R16.2
NetR17_2: R17.2 U4.5 | length 7
  Bottom Layer w0.8: U4.5 135.636,40.64 137.287,40.64 139.319,42.672 R17.2
NetR18_2: R18.2 U2.5 | length 6.1
  Bottom Layer w0.8: U2.5 71.764,40.647 72.778,40.647 74.677,42.546 76.346,42.546 76.581,42.781 R18.2
NetR19_2: R19.2 U3.5 | length 6.6
  Bottom Layer w0.8: U3.5 105.156,86.995 107.696,89.535 109.102,89.535 R19.2
NetR20_2: R20.2 U4.6 | length 6.9
  Bottom Layer w0.8: U4.6 137.287,43.053 139.268,45.034 R20.2
NetR21_2: R21.2 U2.6 | length 6.1
  Bottom Layer w0.8: U2.6 71.763,43.186 72.904,43.186 74.788,45.07 76.346,45.07 76.581,45.305 R21.2
NetR22_2: R22.2 U3.6 | length 6.6
  Bottom Layer w0.8: U3.6 105.029,89.535 107.584,92.09 R22.2
NetR23_2: R23.2 U4.7 | length 6.9
  Bottom Layer w0.8: U4.7 135.514,45.598 136.911,45.598 138.811,47.498 141.503,47.498 R23.2
NetR24_2: R24.2 U2.7 | length 6.1
  Bottom Layer w0.8: U2.7 71.763,45.726 72.904,45.726 74.771,47.593 76.346,47.593 76.581,47.828 R24.2
NetR25_2: R25.2 U3.7 | length 6.6
  Bottom Layer w0.8: U3.7 105.41,92.075 107.765,94.43 108.946,94.43 R25.2
NetR26_2: R26.2 U5.15 | length 15.8
  Top Layer w0.254: v1(66.314,56.154) 66.508,55.96 66.508,55.539 70.358,51.689 v1(70.358,51.435)
  Bottom Layer w0.8: U5.15 v1(66.314,56.154) ; v1(70.358,51.435) 72.771,51.435 74.93,53.594 76.346,53.594 76.366,53.614 R26.2
NetR27_2: R27.2 U6.15 | length 19.7
  Top Layer w0.254: v1(129.423,56.154) v1(132.608,56.154)
  Bottom Layer w0.8: U6.15 v1(129.423,56.154) v1@129.52,56.154 ; v1(132.608,56.154) 132.608,51.923 133.096,51.435 136.906,51.435 137.541,52.07 139.63,52.07 141.345,53.784 141.535,53.784 141.77,54.019 R27.2
NetR28_2: R28.2 U7.15 | length 19.6
  Top Layer w0.254: v1(97.546,56.154) 97.547,56.153 v1(100.82,56.152) v1(100.82,56.152)
  Bottom Layer w0.8: U7.15 v1(97.546,56.154) v1@97.643,56.154 ; v1(100.82,56.152) 100.82,51.707 101.854,50.673 104.14,50.673 107.691,54.224 R28.2
NetR29_2: R29.2 U5.1 | length 6
  Bottom Layer w0.8: U5.1 71.762,53.748 72.544,53.748 74.95,56.154 R29.2
NetR30_2: R30.2 U6.1 | length 7.6
  Bottom Layer w0.8: U6.1 137.815,53.614 140.423,56.222 141.535,56.222 141.77,56.457 R30.2
NetR31_2: R31.2 U7.1 | length 6.8
  Bottom Layer w0.8: U7.1 104.074,53.614 104.142,53.682 104.909,53.682 107.765,56.538 108.992,56.538 R31.2
NetR32_2: R32.2 U5.2 | length 6
  Bottom Layer w0.8: U5.2 71.762,56.288 72.544,56.288 74.95,58.694 R32.2
NetR33_2: R33.2 U6.2 | length 7.5
  Bottom Layer w0.8: U6.2 135.643,56.288 137.441,56.288 140.238,59.085 R33.2
NetR34_2: R34.2 U7.2 | length 6.8
  Bottom Layer w0.8: U7.2 103.659,56.245 104.886,56.245 107.765,59.124 108.896,59.124 108.902,59.129 R34.2
NetR35_2: R35.2 U5.3 | length 6
  Bottom Layer w0.8: U5.3 71.762,58.828 72.544,58.828 74.803,61.087 76.434,61.087 R35.2
NetR36_2: R36.2 U6.3 | length 7.4
  Bottom Layer w0.8: U6.3 137.394,58.694 140.222,61.522 R36.2
NetR37_2: R37.2 U7.3 | length 6.8
  Bottom Layer w0.8: U7.3 103.702,58.828 105.31,58.828 107.819,61.337 108.896,61.337 109.131,61.572 R37.2
NetR38_2: R38.2 U5.4 | length 6
  Bottom Layer w0.8: U5.4 71.857,61.463 72.107,61.463 74.144,63.5 76.346,63.5 76.581,63.735 R38.2
NetR39_2: R39.2 U6.4 | length 7.5
  Bottom Layer w0.8: U6.4 135.643,61.1 137.147,61.1 140.006,63.959 R39.2
NetR40_2: R40.2 U7.4 | length 6.7
  Bottom Layer w0.8: U7.4 105.303,61.234 107.839,63.77 108.896,63.77 109.131,64.005 R40.2
NetR41_2: R41.2 U5.5 | length 6
  Bottom Layer w0.8: U5.5 72.067,63.774 72.417,64.124 72.633,64.124 74.803,66.294 76.346,66.294 76.366,66.314 R41.2
NetR42_2: R42.2 U6.5 | length 7.3
  Bottom Layer w0.8: U6.5 137.307,63.774 139.93,66.397 R42.2
NetR43_2: R43.2 U7.5 | length 6.7
  Bottom Layer w0.8: U7.5 103.588,63.754 105.283,63.754 107.795,66.266 108.909,66.266 R43.2
NetR44_2: R44.2 U5.6 | length 6
  Bottom Layer w0.8: U5.6 72.067,66.314 72.417,66.664 72.633,66.664 74.803,68.834 76.346,68.834 76.366,68.854 R44.2
NetR45_2: R45.2 U6.6 | length 7.5
  Bottom Layer w0.8: U6.6 135.643,66.18 137.401,66.18 140.208,68.987 141.617,68.987 R45.2
NetR46_2: R46.2 U7.6 | length 6.7
  Bottom Layer w0.8: U7.6 103.588,66.294 103.742,66.448 105.183,66.448 107.676,68.941 R46.2
NetR47_2: R47.2 U5.7 | length 6
  Bottom Layer w0.8: U5.7 72.067,68.854 72.417,69.204 72.506,69.204 74.696,71.394 R47.2
NetR48_2: R48.2 U6.7 | length 7.3
  Bottom Layer w0.8: U6.7 137.434,68.854 139.573,70.993 141.535,70.993 141.77,71.228 R48.2
NetR49_2: R49.2 U7.7 | length 6.6
  Bottom Layer w0.8: U7.7 103.702,68.988 105.437,68.988 107.765,71.316 109.053,71.316 R49.2
NetR50_2: R50.2 U8.15 | length 22.6
  Top Layer w0.254: v1(67.437,74.041) 67.501,74.105 72.072,74.105 v1(72.136,74.168)
  Bottom Layer w0.8: U8.15 62.445,79.375 61.976,78.906 61.976,74.51 62.445,74.041 v1(67.437,74.041) ; v1(72.136,74.168) 72.263,74.168 74.676,76.581 76.346,76.581 76.581,76.816 R50.2
NetR51_2: R51.2 U8.1 | length 6.1
  Bottom Layer w0.8: U8.1 71.697,76.904 72.967,76.904 74.994,78.931 76.346,78.931 76.581,79.166 R51.2
NetR52_2: R52.2 U10.15 | length 19.1
  Top Layer w0.254: v1@97.79,32.893 97.79,29.591 v1@98.816,28.565 ; v1@98.562,28.565 v1(98.679,28.565)
  Bottom Layer w0.8: U10.15 v1(97.536,32.893) ; v1(98.679,28.565) 108.662,28.565 109.131,29.034 R52.2
NetR53_2: R53.2 U8.2 | length 6.1
  Bottom Layer w0.8: U8.2 71.633,79.38 73.03,79.38 75.103,81.453 76.346,81.453 76.581,81.688 R53.2
NetR54_2: R54.2 U10.1 | length 6.9
  Bottom Layer w0.8: U10.1 103.703,30.487 105.183,30.487 107.881,33.185 108.896,33.185 109.131,33.42 R54.2
NetR55_2: R55.2 U8.3 | length 6.1
  Bottom Layer w0.8: U8.3 73.152,81.915 75.212,83.975 76.346,83.975 76.581,84.21 R55.2
NetR56_2: R56.2 U10.2 | length 6.9
  Bottom Layer w0.8: U10.2 105.029,32.893 107.622,35.486 108.896,35.486 109.131,35.721 R56.2
NetR57_2: R57.2 U8.4 | length 6.1
  Bottom Layer w0.8: U8.4 73.152,84.455 75.194,86.497 76.346,86.497 76.581,86.732 R57.2
NetR58_2: R58.2 U10.3 | length 6.8
  Bottom Layer w0.8: U10.3 105.302,35.433 107.887,38.019 108.896,38.019 109.131,38.254 R58.2
NetR59_2: R59.2 U8.5 | length 6.1
  Bottom Layer w0.8: U8.5 73.152,86.995 75.176,89.019 76.346,89.019 76.581,89.254 R59.2
NetR60_2: R60.2 U10.4 | length 6.8
  Bottom Layer w0.8: U10.4 103.703,37.839 105.127,37.839 107.807,40.519 108.898,40.519 R60.2
NetR61_2: R61.2 U8.6 | length 6.1
  Bottom Layer w0.8: U8.6 71.697,89.604 72.967,89.604 74.904,91.541 76.346,91.541 76.581,91.776 R61.2
NetR62_2: R62.2 U10.5 | length 6.7
  Bottom Layer w0.8: U10.5 105.156,40.513 107.638,42.995 108.953,42.995 R62.2
NetR63_2: R63.2 U8.7 | length 6
  Bottom Layer w0.8: U8.7 71.762,92.209 73.032,92.209 74.977,94.154 76.346,94.154 76.581,94.389 R63.2
NetR64_2: R64.2 U10.6 | length 6.6
  Bottom Layer w0.8: U10.6 105.283,43.053 107.765,45.535 109.073,45.535 R64.2
NetR65_2: R65.2 U10.7 | length 6.6
  Bottom Layer w0.8: U10.7 105.41,45.593 107.765,47.948 108.896,47.948 108.962,48.013 R65.2
Shift: U1.6 U2.11 U3.11 U4.11 U5.11 U6.11 U7.11 U8.11 U9.11 U10.11 | length 302.8
  Top Layer w0.254: v1(53.721,55.118) 53.785,55.181 53.785,58.864 v1(53.848,58.928) ; v1(58.166,33.782) v1(58.166,43.053) ; v1(66.04,78.613) 66.103,78.549 66.103,72.453 v1(66.167,72.39) ; v1(66.167,67.437) 66.358,67.627 66.358,70.048 v1(66.548,70.238) ; v1(90.551,28.956) 90.614,28.892 90.614,25.336 v1(90.678,25.273) ; v1(90.551,36.322) 90.551,38.354 v1(91.821,39.624) ; v1(91.694,62.992) 91.821,62.865 v1(91.821,59.436) ; v1(92.964,80.236) 93.158,80.431 93.158,81.129 93.408,81.379 93.408,89.344 v1(93.599,89.535) ; v1(93.599,95.758) 93.726,95.885 93.726,96.774 v1(96.52,99.568) ; v1(124.233,66.194) 124.233,65.974 124.841,65.365 v1(124.841,59.182) ; v1(124.333,82.867) 124.396,82.931 124.396,89.344 v1(124.46,89.408) ; v1(124.46,95.885) 124.46,98.893 125.095,99.528 v1(125.095,99.695)
  Bottom Layer w0.8: v1(53.721,55.118) 53.721,44.704 55.372,43.053 v1(58.166,43.053) U2.11 ; v1(53.848,58.928) 53.848,66.04 54.888,67.08 56.666,67.08 U1.6 60.198,67.31 61.194,66.314 U5.11 65.698,66.314 66.167,66.783 v1(66.167,67.437) ; v1(58.166,33.782) 58.166,28.194 61.087,25.273 v1(90.678,25.273) ; U8.11 65.571,89.535 66.04,89.066 v1(66.04,78.613) ; v1(66.167,72.39) 66.167,72.263 66.458,71.972 66.458,70.328 v1(66.548,70.238) ; v1(90.551,28.956) v1(90.551,36.322) ; v1(91.694,62.992) 91.694,78.911 92.964,80.181 v1(92.964,80.236) ; 91.694,66.314 U7.11 ; v1(91.821,39.624) 91.821,43.053 ; v1(91.821,59.436) 91.821,43.053 ; v1(93.599,95.758) v1(93.599,89.535) U3.11 ; U10.11 91.821,43.053 ; v1(96.52,99.568) 124.968,99.568 v1(125.095,99.695) ; v1(124.233,66.194) 124.283,66.244 124.283,82.817 v1(124.333,82.867) ; v1@124.28,66.24 124.293,66.254 127.829,66.254 U6.11 ; v1(124.46,89.408) v1@124.46,90.004 ; v1(124.46,95.885) v1@124.46,90.004 ; v1(124.841,59.182) 124.841,43.522 125.31,43.053 U4.11 ; U9.11 124.929,89.535 v1@124.46,90.004
pads on no net: U1. U1.3 U1.4 U1.5 U1.8 U1.10 U1.11 U1.12 U1.13 U1.14 U1.15 U1.16 U1.17 U1.18 U1.19 U1.20 U1.21 U1.22 U1.23 U1.24 U1.25 U1.26 U1.27 U1.28 U9.9

## Keep-outs
Keep-Out Layer:
  lines w0.254: 18.034,21.336 154.813,21.336 154.813,102.616 18.034,102.616 18.034,21.336

## Text inside footprints (layer, text, board x,y; h text height)
C1: Top Overlay "+" at 25.756,49.92 h1.5 r90
U2: Top Overlay "DIP-16" at 68.582,34.925 h1.5 r90
U3: Top Overlay "DIP-16" at 100.52,81.407 h1.5 r90
U4: Top Overlay "DIP-16" at 132.461,34.925 h1.5 r90
U5: Top Overlay "DIP-16" at 68.58,58.186 h1.5 r90
U6: Top Overlay "DIP-16" at 132.461,58.186 h1.5 r90
U7: Top Overlay "DIP-16" at 100.52,58.186 h1.5 r90
U8: Top Overlay "DIP-16" at 68.58,81.407 h1.5 r90
U9: Top Overlay "DIP-16" at 132.461,81.407 h1.5 r90
U10: Top Overlay "DIP-16" at 100.521,34.925 h1.5 r90